# Altium PCB design6.PcbDoc
Units mm, origin at the board's own origin, x right, y up, seen from the top; angles counter-clockwise.
Board outline 22.01 x 100 mm, 2 copper layers (Top Layer, Bottom Layer); 56 components, 36 nets, 178 pads, 192 vias.
Unrouted connection lines stored in the file: 58.
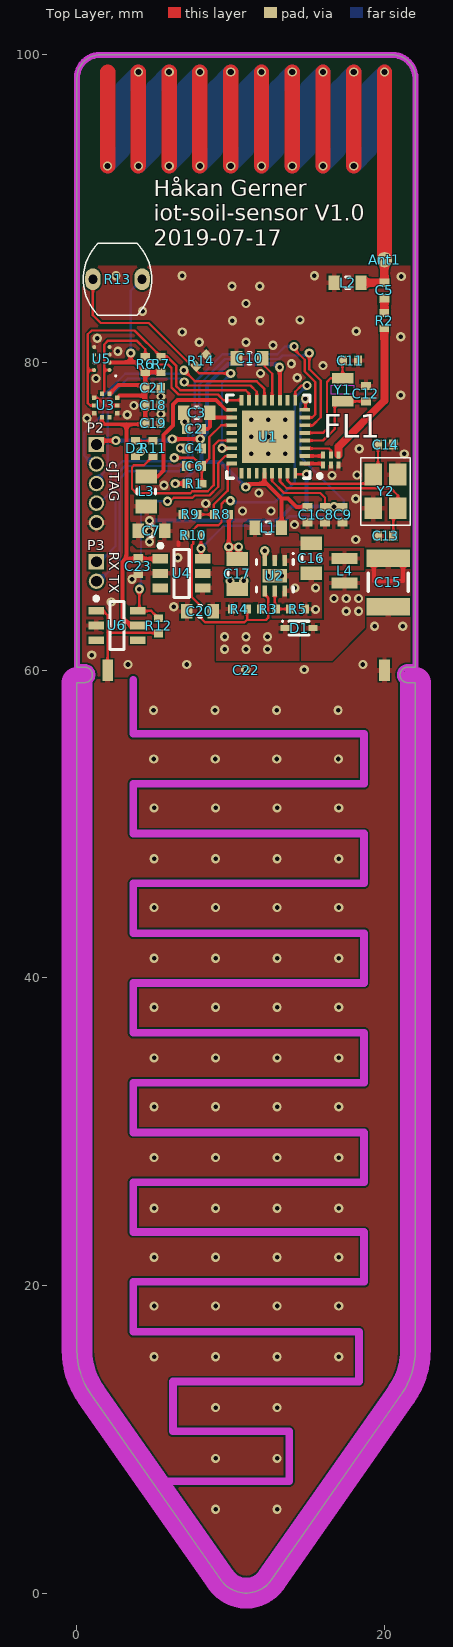
[diagram p0: Top Layer view]
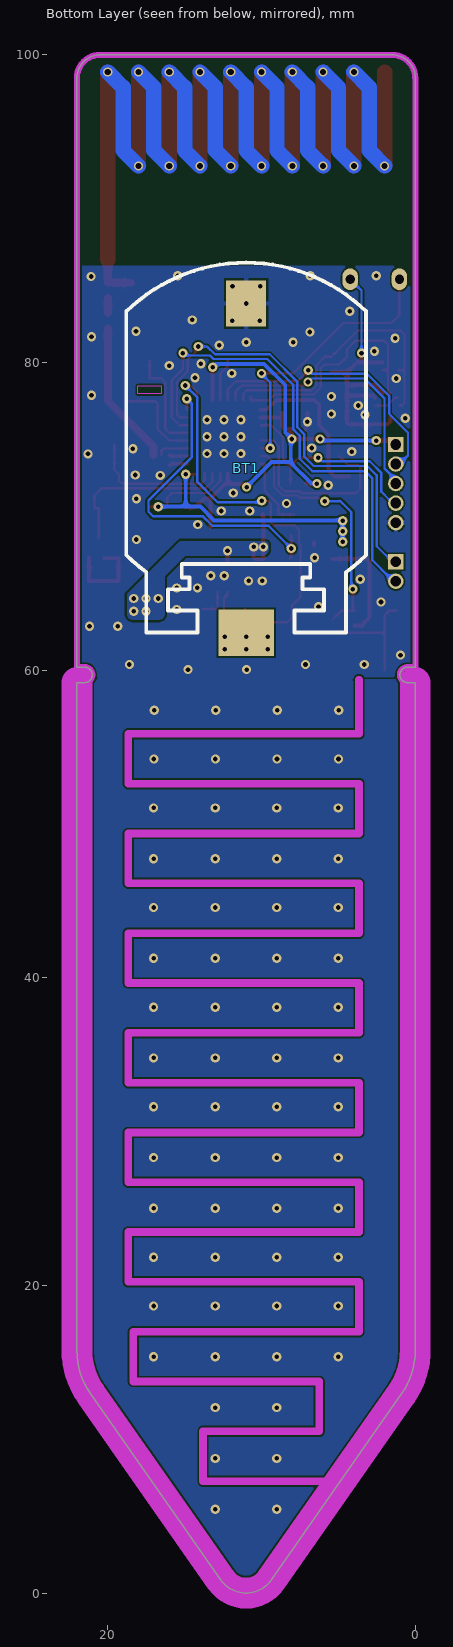
[diagram p1: Bottom Layer view, seen from below]
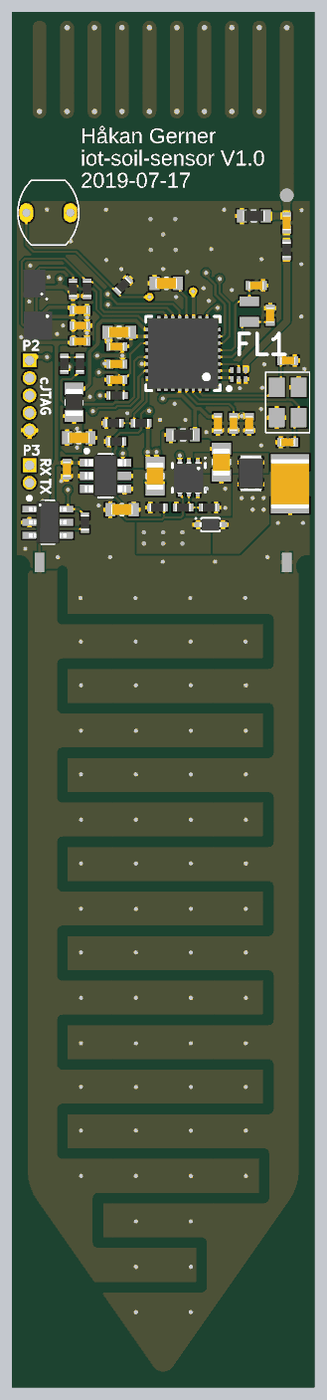
[diagram p2: 3D render of the assembled board from above, using the file's embedded part models]

## Layer stack, top to bottom
Top Solder: solder mask 0.0102, Solder Resist, Dk 3.5
Top Layer: signal copper 0.0356
Dielectric 1: dielectric 0.32, FR-4, Dk 4.8
Bottom Layer: signal copper 0.0356
Bottom Solder: solder mask 0.0102, Solder Resist, Dk 3.5

## Board outline
0.911,12.938 cw(c5.006,15.806) 0.006,15.806 0.006,59.198 0.508,59.198 ccw(c0.508,59.698) 0.501,60.198 0.001,60.198 0.001,98.506 0.006,98.506 cw(c1.506,98.506) 1.506,100.006 20.506,100.006 cw(c20.506,98.506) 22.006,98.506 22.006,60.198 21.513,60.198 ccw(c21.506,59.698) 21.506,59.198 22.006,59.198 22.006,15.806 cw(c17.006,15.806) 21.102,12.938 12.645,0.859 cw(c11.006,2.006) 9.368,0.859

## Design rules (kind name [scope] priority, off if disabled: settings)
Clearance [All] p1: gap=0.127 ignorepadtopadclearanceinfootprint=FALSE
ComponentClearance ComponentClearance_1 [InComponent('FL1') vs InComponent('U1')] p1: gap=0 collisioncheckmode=3 verticalgap=0 showdistances=FALSE
ComponentClearance ComponentClearance_2 [InComponent('Ant1') vs InComponent('R13')] p2: gap=0 collisioncheckmode=3 verticalgap=0 showdistances=FALSE
ComponentClearance [All] p3: gap=0.254 collisioncheckmode=3 verticalgap=0.254 showdistances=FALSE
DiffPairsRouting [All] p1: maxlimit=0.127 minlimit=0.127 mostfreqgap=0.127 toplayer_minwidth=0.218 toplayer_maxwidth=0.218 toplayer_prefwidth=0.218 bottomlayer_minwidth=0.218 bottomlayer_maxwidth=0.218 bottomlayer_prefwidth=0.218 maxuncoupledlength=12.7
Height Height_1 [InComponent('U3')] p1: minheight=0 maxheight=100 prefheight=12.7
Height [All] p2: minheight=0 maxheight=25.4 prefheight=12.7
HoleSize [All] p1: absolutevalues=TRUE maxlimit=2.54 minlimit=0.3 maxpercent=80.000 minpercent=20.000
MinimumSolderMaskSliver [All] p1: minsoldermaskwidth=0.127
PlaneClearance [All] p1: clearance=0.127
PlaneConnect [All] p1: planeconnectstyle=Direct reliefexpansion=0.508 reliefentries=4 reliefconductorwidth=0.254 reliefairgap=0.254
PolygonConnect [All] p1: thpad.connectstyle=Relief thpad.reliefconductorwidth=0.305 thpad.reliefentries=4 thpad.polygonreliefangle="90 Angle" thpad.airgapwidth=0.127 smdpad.connectstyle=Relief smdpad.reliefconductorwidth=0.305 smdpad.reliefentries=4 smdpad.polygonreliefangle="90 Angle" smdpad.airgapwidth=0.127 via.connectstyle=Direct via.reliefconductorwidth=0.254 via.reliefentries=4 via.polygonreliefangle="90 Angle" via.airgapwidth=0.254
RoutingVias [All] p1: holewidth=0.4 width=0.7 viastyle="Through Hole" minholewidth=0.3 minwidth=0.6 maxholewidth=0.5 maxwidth=0.8
SilkToSilkClearance [All] p1: silktosilkclearance=0.152
SolderMaskExpansion [All] p1: expansion=0.127
Width Width_50ohm [InNet('NetAnt1_1') OR InNet('NetFL1_1') OR InNet('NetC5_1')         OR InComponent('Ant1')] p1: maxlimit=1.27 minlimit=0.508 preferedwidth=0.508 minimp=50.000000 maximp=50.000000 favimp=50.000000
Width [All] p2: maxlimit=0.254 minlimit=0.127 preferedwidth=0.152 minimp=50.000000 maximp=50.000000 favimp=50.000000
22 further rules are at their usual default settings.

## Classes and differential pairs
differential pair RF: +RF_P -RF_N

## Components (designator, comment, footprint, x,y, rotation, side; value= is the part's Value field where it differs from the comment)
Ant1 "Antenna 868 Helix" ANTENNA_868_HELIX 20,86.69 r180 top net-tie
BT1 "Battery Coin Cell" S8421-45R 10.998,64 r180 bottom
C1 "Cap" "0402 (CAP)" 14.986,70.104 r90 top value=100nF
C2 "Cap" "0402 (CAP)" 7.62,75.692 r0 top value=100nF
C3 "Cap" "0603 (CAP)" 7.798,76.733 r0 top value=22uF
C4 "Cap" "0402 (CAP)" 7.62,74.422 r0 top value=100nF
C5 "Cap" "0402 (CAP)" 19.99,84.692 r90 top value=8.2pF
C6 "Cap" "0402 (CAP)" 7.62,73.279 r180 top value=100nF
C7 "Cap" "0603 (CAP)" 4.851,69.063 r180 top value=22uF
C8 "Cap" "0402 (CAP)" 16.129,70.104 r90 top value=100nF
C9 "Cap" "0402 (CAP)" 17.272,70.104 r90 top value=100nF
C10 "Cap" "0603 (CAP)" 11.227,80.289 r0 top value=1uF
C11 "Cap" "0402 (CAP)" 17.78,80.137 r180 top value=12pF
C12 "Cap" "0402 (CAP)" 18.796,77.978 r270 top value=12pF
C13 "DNM" "0402 (CAP)" 20.066,68.732 r0 top value=12pF
C14 "DNM" "0402 (CAP)" 20.074,74.676 r180 top value=12pF
C15 "GRM32EC70J107ME15L" "1210 (CAP)" 20.244,65.71 r90 top value=100uF
C16 "Cap" "0805 (CAP)" 15.24,67.285 r90 top value=22uF
C17 "Cap" "0805 (CAP)" 10.414,66.269 r90 top value=10uF
C18 "Cap" "0402 (CAP)" 4.953,77.216 r180 top value=100nF
C19 "Cap" "0402 (CAP)" 4.953,76.073 r180 top value=100nF
C20 "Cap" "0603 (CAP)" 8.001,63.83 r0 top value=1uF
C21 "Cap" "0402 (CAP)" 4.953,78.359 r180 top value=100nF
C22 "Chumidity" SOIL_CAP 11,17 r0 top locked net-tie value=1pF
C23 "Cap" "0402 (CAP)" 3.988,66.777 r90 top value=100nF
D1 "RB751S40T5G" SOD-523 14.453,62.738 r0 top
D2 "SML-P11VTT86R" "0402 (RES)"#1 3.81,74.422 r270 top
FL1 "Balun" 0850BM14E0016 16.51,73.66 r0 top
L1 "BLM18HE152SN1D" "0603 (IND)" 12.446,69.266 r0 top value="1500 Ohm"
L2 "Inductor" "0603 (IND)" 17.602,85.192 r180 top value=68nH
L3 "MLZ2012N6R8LT000" "0805 (IND)" 4.521,71.628 r270 top value=6.8uH
L4 "Inductor" SRN2009T 17.399,66.472 r90 top value=3.3uH
P2 "cJTAG" 5pin-1.27 1.27,72.136 r270 top
P3 "UART" 2pin-1.27 1.27,66.421 r270 top
R1 "Res1" "0402 (RES)"#2 7.62,72.136 r180 top value=100K
R2 "" "0402 (RES)"#1 19.99,82.728 r90 top value=0
R3 "DNM" "0402 (RES)"#1 12.446,63.983 r0 top value=0
R4 "Res1" "0402 (RES)"#1 10.566,63.983 r0 top value=10K
R5 "DNM" "0402 (RES)"#1 14.351,63.983 r0 top value=0
R6 "Res1" "0402 (RES)"#1 4.445,79.883 r270 top value=4.7K
R7 "Res1" "0402 (RES)"#1 5.461,79.883 r270 top value=4.7K
R8 "Res1" "0402 (RES)"#1 9.398,70.129 r0 top value=200K
R9 "Res1" "0402 (RES)"#1 7.366,70.129 r0 top value=200K
R10 "Res1" "0402 (RES)"#1 7.569,68.783 r0 top value=4.7K
R11 "Res1" "0402 (RES)"#1 4.953,74.422 r90 top value=1.8K
R12 "Rcharge" "0402 (RES)"#1 5.309,62.89 r90 top value=1k
R13 "200K - 10K" Photoresistor 2.642,85.42 r180 top
R14 "Res1" "0402 (RES)"#1 8.077,80.137 r225 top value=4.7K
U1 "CC1310RHB" VQFN-32_5X5 12.446,75.184 r180 top
U2 "TPS61291" TPS61291 12.868,66.142 r270 top
U3 "BMP388, Pressure sensor" BMP388 1.88,77.216 r0 top
U4 "TPS22860" SOT23-5 6.807,66.294 r0 top
U5 "HDC1010, Humidity, Temp" HDC1010 1.626,80.264 r180 top
U6 "74LVC2G14, Inverting Schmitt Trigger" 74LVC2G14 2.603,62.912 r0 top
Y1 "FC-12M 32.7680KA-A3" "FC-12M 32.7680KA-A3" 17.272,78.232 r270 top
Y2 "TSX-3225 24.0000MF20G-AC3" "TSX-3225 24.0000MF20G-AC3" 20.066,71.628 r90 top

## Footprints (in the part's own frame and the unit in brackets; to place one, negate y for a bottom-side part, rotate by r counter-clockwise, add the part's x,y. Pads: shape width x height; smd on the part's side, far side on the other; paste and mask are expansions set on the pad)
2pin-1.27 [mm]
  rect 1x1 hole 0.7: 1(-0.635,0)
  round 1 hole 0.7: 2(0.635,0)
5pin-1.27 [mm]
  rect 1x1 hole 0.7: 1(-2.54,0)
  round 1 hole 0.7: 2(-1.27,0) 3(0,0) 4(1.27,0) 5(2.54,0)
74LVC2G14 [mm] "TSOP, 6-Leads, Body 2,90x1,50mm, Pitch 0,95mm, IPC Medium Density"
  rect 1x0.5 smd: 1(-1.35,0.95) 2(-1.35,0) 3(-1.35,-0.95) 4(1.35,-0.95) 5(1.35,0) 6(1.35,0.95)
  silkscreen extent -1.47,-1.55 0.45,1.87, body extent -1.38,-1.55 1.38,1.55, height 1.1
"0402 (CAP)" [mm] "Chip Capacitor, 2-Leads, Body 1,60x0,80mm, IPC Medium Density"
  rect 0.54x0.64 smd: 1(-0.5,0) 2(0.5,0)
  body extent -0.55,-0.3 0.55,0.3, height 0.4
"0402 (RES)"#1 [mm] "Chip Resistor, 2-Leads, Body 1,00x0,50mm, IPC Medium Density"
  rect 0.5x0.6 smd: 1(-0.5,0) 2(0.5,0)
  body extent -0.55,-0.3 0.55,0.3, height 0.4
"0402 (RES)"#2 [mm] "Chip Resistor, 2-Leads, Body 1,00x0,50mm, IPC Medium Density"
  rect 0.6x0.5 smd: 1(-0.5,0)
  rect 0.5x0.6 smd: 2(0.5,0)
  body extent -0.55,-0.3 0.55,0.3, height 0.4
"0603 (CAP)" [mm] "Chip Capacitor, 2-Leads, Body 1,60x0,80mm, IPC Medium Density"
  rect 0.75x0.95 smd: 1(-0.85,0) 2(0.85,0)
  silkscreen extent -0.1,-0.38 0.1,0.38, body extent -0.8,-0.4 0.8,0.4, height 0.6
"0603 (IND)" [mm]
  rect 0.72x0.94 smd: 1(-0.87,0) 2(0.87,0)
  silkscreen extent -0.15,-0.37 0.15,0.37, body extent -0.8,-0.4 0.8,0.4, height 0.6
"0805 (CAP)" [mm] "Chip Capacitor, 2-Leads, Body 2,00x1,25mm, IPC Medium Density"
  rect 0.9x1.4 smd: 1(-0.975,0) 2(0.975,0)
  silkscreen extent -0.15,-0.6 0.15,0.6, body extent -1,-0.63 1,0.63, height 0.6
"0805 (IND)" [mm] "Chip Inductor, 2-Leads, Body 2,00x1,25mm, IPC Medium Density"
  rect 0.9x1.39 smd: 1(-0.98,0) 2(0.98,0)
  silkscreen extent -0.15,-0.6 0.15,0.6, body extent -1,-0.63 1,0.63, height 0.6
0850BM14E0016 [mm]
  rect 0.25x0.45 smd: 1(0.5,0.325) 2(0,0.325) 3(-0.5,0.325) 4(-0.5,-0.325) 5(0,-0.325) 6(0.5,-0.325)
  body extent -0.74,-0.66 0.74,0.66, height 1
"1210 (CAP)" [mm] "Chip Capacitor, 2-Leads, Body 3,20x2,50mm, IPC Medium Density"
  rect 1.15x2.8 smd: 1(-1.575,0) 2(1.575,0)
  silkscreen extent -0.6,-1.3 0.6,1.3, body extent -1.8,-1.4 1.8,1.4, height 2.8
ANTENNA_868_HELIX [mm]
  round 1 smd: 1(0,0)
  Top Layer lines w1: 18,-6.1 18,-12.2 ; 16,-6.1 16,-12.2 ; 14,-6.1 14,-12.2 ; 12,-6.1 12,-12.2 ; 10,-6.1 10,-12.2 ; 8,-6.1 8,-12.2 ; 6,-6.1 6,-12.2 ; 4,-6.1 4,-12.2 ; 2,-6.1 2,-12.2 ; 0,0 0,-12.2
  Bottom Layer lines w1: 18,-6.1 17,-7.1 17,-11.2 16,-12.2 ; 16,-6.1 15,-7.1 15,-11.2 14,-12.2 ; 14,-6.1 13,-7.1 13,-11.2 12,-12.2 ; 12,-6.1 11,-7.1 11,-11.2 10,-12.2 ; 10,-6.1 9,-7.1 9,-11.2 8,-12.2 ; 8,-6.1 7,-7.1 7,-11.2 6,-12.2 ; 6,-6.1 5,-7.1 5,-11.2 4,-12.2 ; 4,-6.1 3,-7.1 3,-11.2 2,-12.2 ; 2,-6.1 1,-7.1 1,-11.2 0,-12.2
BMP388 [mm] "LGA, 10-Leads, Body 2,00x2,00mmx0,80mm, Pitch 0,50mm"
  rect 0.275x0.275 smd: 1(0.25,0.762) 2(-0.25,0.762) 3(-0.75,0.5) 4(-0.75,0) 5(-0.75,-0.5) 6(-0.25,-0.763) 7(0.25,-0.763) 8(0.75,-0.5) 9(0.75,0) 10(0.75,0.5)
  body extent -1.02,-1.03 1.65,1.02, height 30
"FC-12M 32.7680KA-A3" [mm]
  rect 0.7x1.4 smd: 1(-0.75,0) 2(0.75,0)
  Keep-Out Layer region: -0.254,-0.762 0.254,-0.762 0.254,0.762 -0.254,0.762
  body extent -1.19,-0.79 1.19,0.79, height 1
HDC1010 [mm] "BGA, 8-Leads, Body 1,59x2,04mmx0,68mm, Pitch 0,50mm"
  round 0.26 smd: A1(-0.5,0.75) A2(0.5,0.75) B1(-0.5,0.25) B2(0.5,0.25) C1(-0.5,-0.25) C2(0.5,-0.25) D1(-0.5,-0.75) D2(0.5,-0.75)
  silkscreen extent -0.95,1.08 -0.85,1.17, body extent -0.79,-1.02 0.79,1.02, height 0.67
Photoresistor [mm]
  oval 1x1.4 hole 0.6: 1(-1.6,0) 2(1.6,0)
  silkscreen extent -2.22,-2.35 2.22,2.35
S8421-45R [mm]
  rect 3.6x3 smd: 1(0,-1.556)
  rect 2.6x3 smd: 2(0,19.844)
  silkscreen extent -7.8,-1.56 7.8,22.5, body extent -11.04,-3.19 11.04,22.79, height 4.7
SOD-523 [mm] "Molded Diode, 2-Leads, Body 1,20x0,80mm, IPC Medium Density"
  rect 0.6x0.4 smd: 1(-0.9,0) 2(0.9,0)
  silkscreen extent -1.12,-0.45 0.65,0.5, body extent -0.87,-0.45 0.87,0.45, height 0.7
SOIL_CAP [mm]
  rect 0.7x1.4 smd: 1(-9,43) 2(9,43)
  Keep-Out Layer lines w0.5: -7.339,42.393 -7.339,38.867 7.661,38.867 7.661,35.628 -7.339,35.628 -7.339,32.389 7.661,32.389 7.661,29.15 -7.339,29.15 -7.339,25.911 7.661,25.911 7.661,22.672 -7.339,22.672 -7.339,19.434 7.661,19.434 7.661,16.195 -7.339,16.195 -7.339,12.956 7.661,12.956 7.661,9.717 -7.339,9.717 -7.339,6.478 7.661,6.478 7.661,3.239 -7.339,3.239 -7.339,0 7.339,0 7.339,-3.239 -4.749,-3.239 -4.749,-6.478 2.803,-6.478 2.803,-9.717 -5.777,-9.717
SOT23-5 [mm] "SOT23, 5-Leads, Body 2,90x2,80mm, Pitch 0,95mm, IPC Medium Density"
  rect 1x0.6 smd: 1(-1.375,0.95) 2(-1.375,0) 3(-1.375,-0.95) 4(1.375,-0.95) 5(1.375,0) 6(1.375,0.95)
  silkscreen extent -1.5,-1.55 0.5,1.92, body extent -1.5,-1.53 1.5,1.53, height 1.45
SRN2009T [mm] "Molded Inductor, 2-Leads, Body 2,00x1,60mm, IPC Medium Density"
  rect 0.7x1.7 smd: 1(-0.8,0) 2(0.8,0)
  body extent -1.32,-0.9 1.32,0.9, height 0.95
TPS61291 [mm] "SON, 6-Leads, Body 2,00x2,00mm, Pitch 0,65mm, Thermal Pad 1,60x0,89mm, IPC Medium Density"
  rect 0.7x0.3 smd: 1(-0.995,0.65) 2(-0.995,0) 3(-0.995,-0.65) 4(0.995,-0.65) 5(0.995,0) 6(0.995,0.65)
  rect 0.89x1.6 smd: 7(0,0)
  silkscreen extent -1.5,-1.2 1.05,1.25, body extent -1.13,-1.05 1.13,1.05, height 0.8
"TSX-3225 24.0000MF20G-AC3" [mm]
  rect 1.4x1.15 smd: 1(-1.1,-0.8) 2(1.1,-0.8) 3(1.1,0.8) 4(-1.1,0.8)
  silkscreen extent -2.2,-1.6 2.2,1.6, body extent -2.2,-1.6 2.2,1.6, height 1
VQFN-32_5X5 [mm] "QFN, 32-Leads, Body 5,00x5,00mm, Pitch 0,50mm, Thermal Pad 3,45x3,45mm, IPC Medium Density"
  rect 0.7x0.25 smd: 1(-2.375,1.75) 2(-2.375,1.25) 3(-2.375,0.75) 4(-2.375,0.25) 5(-2.375,-0.25) 6(-2.375,-0.75) 7(-2.375,-1.25) 8(-2.375,-1.75) 17(2.375,-1.75) 18(2.375,-1.25) 19(2.375,-0.75) 20(2.375,-0.25) 21(2.375,0.25) 22(2.375,0.75) 23(2.375,1.25) 24(2.375,1.75)
  rect 0.25x0.7 smd: 9(-1.75,-2.375) 10(-1.25,-2.375) 11(-0.75,-2.375) 12(-0.25,-2.375) 13(0.25,-2.375) 14(0.75,-2.375) 15(1.25,-2.375) 16(1.75,-2.375) 25(1.75,2.375) 26(1.25,2.375) 27(0.75,2.375) 28(0.25,2.375) 29(-0.25,2.375) 30(-0.75,2.375) 31(-1.25,2.375) 32(-1.75,2.375)
  rect 3.4x3.4 smd: 33(0,0)
  silkscreen extent -3.47,-2.7 2.7,2.7, body extent -2.55,-2.55 2.55,2.55, height 1

## Part data
BT1: Part Number=S8421-45R
C1 C2 C4 C6 C8 C9 C18 C19 C21 C23: "Capacitor", Part Number=GCM155R71C104KA55J, LatestRevisionDate=17-Jul-2002, LatestRevisionNote="Re-released for DXP Platform.", PackageDescription="Radial Cap, Thru-Hole; 2 Leads; 0.3 in Pin Spacing", PackageReference=RAD-0.3, Published=8-Jun-2000, Publisher="Altium Limited"
C3 C7 C16: "Capacitor", Part Number=GRM21BD71A226ME44L, LatestRevisionDate=17-Jul-2002, LatestRevisionNote="Re-released for DXP Platform.", PackageDescription="Radial Cap, Thru-Hole; 2 Leads; 0.3 in Pin Spacing", PackageReference=RAD-0.3, Published=8-Jun-2000, Publisher="Altium Limited"
C5: "Capacitor", Part Number=250R05L8R2CV4T, LatestRevisionDate=17-Jul-2002, LatestRevisionNote="Re-released for DXP Platform.", PackageDescription="Radial Cap, Thru-Hole; 2 Leads; 0.3 in Pin Spacing", PackageReference=RAD-0.3, Published=8-Jun-2000, Publisher="Altium Limited"
C10 C20: "Capacitor", Part Number=GCM188R71E105KA64D, LatestRevisionDate=17-Jul-2002, LatestRevisionNote="Re-released for DXP Platform.", PackageDescription="Radial Cap, Thru-Hole; 2 Leads; 0.3 in Pin Spacing", PackageReference=RAD-0.3, Published=8-Jun-2000, Publisher="Altium Limited"
C11 C12: "Capacitor", Part Number=GCM1555C1H120JA16D, LatestRevisionDate=17-Jul-2002, LatestRevisionNote="Re-released for DXP Platform.", PackageDescription="Radial Cap, Thru-Hole; 2 Leads; 0.3 in Pin Spacing", PackageReference=RAD-0.3, Published=8-Jun-2000, Publisher="Altium Limited"
C13 C14: library part Cap, "Capacitor", Part Number=GCM1555C1H120JA16D, LatestRevisionDate=17-Jul-2002, LatestRevisionNote="Re-released for DXP Platform.", PackageDescription="Radial Cap, Thru-Hole; 2 Leads; 0.3 in Pin Spacing", PackageReference=RAD-0.3, Published=8-Jun-2000, Publisher="Altium Limited"
C15: library part Cap, "Capacitor", Part Number=GCM155R71C104KA55J, LatestRevisionDate=17-Jul-2002, LatestRevisionNote="Re-released for DXP Platform.", PackageDescription="Radial Cap, Thru-Hole; 2 Leads; 0.3 in Pin Spacing", PackageReference=RAD-0.3, Published=8-Jun-2000, Publisher="Altium Limited"
C17: "Capacitor", Part Number=GRM21BC71C106KE11L, LatestRevisionDate=17-Jul-2002, LatestRevisionNote="Re-released for DXP Platform.", PackageDescription="Radial Cap, Thru-Hole; 2 Leads; 0.3 in Pin Spacing", PackageReference=RAD-0.3, Published=8-Jun-2000, Publisher="Altium Limited"
C22: library part Cap, "Capacitor", Part Number=N/A, LatestRevisionDate=17-Jul-2002, LatestRevisionNote="Re-released for DXP Platform.", PackageDescription="Radial Cap, Thru-Hole; 2 Leads; 0.3 in Pin Spacing", PackageReference=RAD-0.3, Published=8-Jun-2000, Publisher="Altium Limited"
D1: library part "D Schottky", "Schottky Diode", Code_JEDEC=DO-214-AA, LatestRevisionDate=17-Jul-2002, LatestRevisionNote="Re-released for DXP Platform.", PackageDescription="DO-214-AA/SMB; 2 C-Bend Leads; Body 5.3 x 3.6 mm, inc. leads (LxW)", PackageReference=SMB, Part Number=RB751S40T5G, Published=8-Jun-2000, Publisher="Altium Limited"
D2: library part LED2, "Typical RED, GREEN, YELLOW, AMBER GaAs LED", LatestRevisionDate=17-Jul-2002, LatestRevisionNote="Re-released for DXP Platform.", PackageDescription="SM LED; 2 Flat Leads", PackageReference=3.2X1.6X1.1, PackageVersion=Feb-2002, Part Number=SML-P11VTT86R, Published=8-Jun-2000, Publisher="Altium Limited"
FL1: library part 0850BM14E0016, Part Number=0850BM14E0016T
L1: library part "Inductor Iron", "Magnetic-Core Inductor", LatestRevisionDate=17-Jul-2002, LatestRevisionNote="Re-released for DXP Platform.", PackageDescription="Axial Device, Thru-Hole; 2 Leads; 0.9 in Pin Spacing", PackageReference=AXIAL-0.9, Part Number=BLM18HE152SN1D, Published=24-Mar-1999, Publisher="Altium Limited"
L2: Part Number=PE-0603CD680GTT, Code_IEC=1005, Code_JEITA=0603, LatestRevisionDate=29-May-2009, LatestRevisionNote="IPC-7351 Footprint Added.", PackageDescription="Chip Inductor", PackageReference=0603, Published=8-Jun-2000, Publisher="Altium Limited"
L3: library part Inductor, "Inductor", Code_IEC=1005, Code_JEITA=0402, LatestRevisionDate=29-May-2009, LatestRevisionNote="IPC-7351 Footprint Added.", PackageDescription="Chip Inductor", PackageReference=0402-A, Part Number=MLZ2012N6R8LT000, Published=8-Jun-2000, Publisher="Altium Limited"
L4: Part Number=SRN2009T-3R3M, Code_IEC=1005, Code_JEITA=0402, LatestRevisionDate=29-May-2009, LatestRevisionNote="IPC-7351 Footprint Added.", PackageDescription="Chip Inductor", PackageReference=0402-A, Published=8-Jun-2000, Publisher="Altium Limited"
P2: library part "Header 5", "Header, 5-Pin", LatestRevisionDate=17-Jul-2002, LatestRevisionNote="Re-released for DXP Platform.", Publisher="Altium Limited"
P3: library part "Header 2", "Header, 2-Pin", LatestRevisionDate=17-Jul-2002, LatestRevisionNote="Re-released for DXP Platform.", Publisher="Altium Limited"
R1: "Resistor", Part Number=CRCW0402100KFKED, LatestRevisionDate=17-Jul-2002, LatestRevisionNote="Re-released for DXP Platform.", PackageDescription="Axial Device, Thru-Hole; 2 Leads; 0.3 in Pin Spacing", PackageReference=AXIAL-0.3, Published=8-Jun-2000, Publisher="Altium Limited"
R2 R3 R5: library part Res1, "Resistor", Part Number=ERJ-2GE0R00X, LatestRevisionDate=17-Jul-2002, LatestRevisionNote="Re-released for DXP Platform.", PackageDescription="Axial Device, Thru-Hole; 2 Leads; 0.3 in Pin Spacing", PackageReference=AXIAL-0.3, Published=8-Jun-2000, Publisher="Altium Limited"
R4: "Resistor", Part Number=CRCW040210K0JNEDC, LatestRevisionDate=17-Jul-2002, LatestRevisionNote="Re-released for DXP Platform.", PackageDescription="Axial Device, Thru-Hole; 2 Leads; 0.3 in Pin Spacing", PackageReference=AXIAL-0.3, Published=8-Jun-2000, Publisher="Altium Limited"
R6 R7 R10 R14: "Resistor", Part Number=CRCW04024K70FKEDC, LatestRevisionDate=17-Jul-2002, LatestRevisionNote="Re-released for DXP Platform.", PackageDescription="Axial Device, Thru-Hole; 2 Leads; 0.3 in Pin Spacing", PackageReference=AXIAL-0.3, Published=8-Jun-2000, Publisher="Altium Limited"
R8 R9: "Resistor", Part Number=CRG0402F4K7, LatestRevisionDate=17-Jul-2002, LatestRevisionNote="Re-released for DXP Platform.", PackageDescription="Axial Device, Thru-Hole; 2 Leads; 0.3 in Pin Spacing", PackageReference=AXIAL-0.3, Published=8-Jun-2000, Publisher="Altium Limited"
R11: "Resistor", Part Number=ERJ-2RKF1801X, LatestRevisionDate=17-Jul-2002, LatestRevisionNote="Re-released for DXP Platform.", PackageDescription="Axial Device, Thru-Hole; 2 Leads; 0.3 in Pin Spacing", PackageReference=AXIAL-0.3, Published=8-Jun-2000, Publisher="Altium Limited"
R12: library part Res1, "Resistor", Part Number=RMCF0402ZT0R00CT-ND, LatestRevisionDate=17-Jul-2002, LatestRevisionNote="Re-released for DXP Platform.", PackageDescription="Axial Device, Thru-Hole; 2 Leads; 0.3 in Pin Spacing", PackageReference=AXIAL-0.3, Published=8-Jun-2000, Publisher="Altium Limited"
R13: library part "Photo Resistor"
U1: Part Number=CC1310F128RHBT
U2: Part Number=TPS61291DRVR
U3: library part BMP388, Part Number=BMP388
U4: Part Number=TPS22860DBVR
U5: library part HDC1010, Part Number=HDC1010YPAR
U6: library part 74LVC2G14, Part Number=74LVC2G14GV,125
Y1: library part XTAL, "Crystal Oscillator", LatestRevisionDate=17-Jul-2002, LatestRevisionNote="Re-released for DXP Platform.", PackageDescription="Crystal, Thru-Hole; 2 Leads; Body 3.1 x 8.2 mm (Dia.xH)", PackageReference=R38, Part Number="FC-12M 32.7680KA-A3", Published=8-Jun-2000, Publisher="Altium Limited"
Y2: library part Crystal, Part Number="TSX-3225 24.0000MF20G-AC3"

## Via types
v1: diameter 0.6, hole 0.3, Top Layer to Bottom Layer, tented both sides, 163 vias
v2: diameter 0.6, hole 0.4, Top Layer to Bottom Layer, tented both sides, 18 vias
v3: diameter 0.6, hole 0.3, Top Layer to Bottom Layer, tented bottom, 9 vias
v4: diameter 0.6, hole 0.3, Top Layer to Bottom Layer, 2 vias

## Nets (pads, with @x,y where several pads share a name; then routed paths per layer and width w, separated by ;. In a path a pad name is that pad's centre, name@x,y a point inside that pad or via, vN(x,y) a via of type N, cw(c..) or ccw(c..) an arc to the next point about the centre after c; other vN are vias at no path point)
Bat_Sense: R8.1 R9.2 U1.24 | length 5
  Top Layer w0.152: R9.2 R8.1 8.898,70.772 9.804,71.679 9.804,73.434 U1.24
DCDC_SW: L3.1 U1.17 | length 10.2
  Top Layer w0.254: L3.1@4.318,72.608 L3.1 5.258,72.608 5.639,72.989 5.639,75.311 5.827,75.499 5.828,75.499 5.977,75.648 5.977,75.649 6.248,75.921 6.248,77.267 6.553,77.572 9.042,77.572 9.68,76.934 U1.17
EN_BYP: R4.2 U1.9 U2.4 | length 29.9
  Top Layer w0.152: v1(9.982,71.018) 9.601,71.018 9.398,70.815 9.398,69.621 9.195,69.418 7.849,69.418 7.569,69.139 7.569,68.224 7.468,68.123 7.468,64.77 8.026,64.211 8.026,63.627 8.028,63.626 8.028,63.426 8.335,63.119 10.897,63.119 11.049,63.271 ; R4.2 11.066,63.289 11.049,63.271 ; U2.4 12.218,64.921 12.446,64.694 12.446,63.424 12.294,63.271 11.049,63.271 ; U1.9 14.196,78.105 14.602,78.511 v1(14.961,78.511)
  Bottom Layer w0.152: v1(9.982,71.018) 10.084,70.917 12.852,70.917 14.173,72.238 14.173,77.724 v1(14.961,78.511)
GND: BT1.2 C1.1 C2.1 C3.1 C4.1 C6.2 C7.1 C8.1 C9.1 C10.1 C11.1 C12.1 C13.1 C14.1 C15.1 C16.1 C17.1 C18.1 C19.1 C20.1 C21.1 C22.2 C23.1 D2.2 FL1.5 FL1.6 L2.2 P2.5 R5.2 R9.1 R10.1 R14.1 U1.33 U2.6 U2.7 U3.3 U3.5 U3.8 U3.9 U4.2 U5.B2 U5.C1 U5.D1 U5.D2 U6.2 Y2.2 Y2.4 | length 3.4
  Top Layer w0.152: U3.3 1.329,77.716 1.829,77.216 U3.9
  Top Layer w0.254: 6.604,68.148 6.604,68.318 ; v1(6.731,74.447) 7.095,74.447 C4.1 ; v1(7.018,76.149) C3.1@7.018,76.733 ; C2.1@7.12,75.641 v1@7.12,76.2
  other v1: 9.018,5.461 13.018,5.461 9.018,12.065 13.018,12.065 5.018,18.669 9.018,18.669 13.018,18.669 17.018,18.669 5.018,25.019 9.018,25.019 13.018,25.019 17.018,25.019 5.018,31.623 9.018,31.623 13.018,31.623 17.018,31.623 5.018,38.1 9.018,38.1 13.018,38.1 17.018,38.1 5.018,44.577 9.018,44.577 13.018,44.577 17.018,44.577 5.018,51.054 9.018,51.054 13.018,51.054 17.018,51.054 4.982,57.404 8.982,57.404 12.982,57.404 16.982,57.404 10.973,60.046 14.783,60.046 3.327,60.376 7.144,60.376 18.593,60.376 0.965,60.985 19.355,62.865 21.184,62.865 15.519,63.957 6.299,64.135 2.235,64.44 14.173,65.354 15.519,65.354 9.957,65.811 10.846,65.811 3.581,65.913 12.421,66.142 13.31,66.142 6.553,67.31 18.136,68.504 14.148,69.469 10.77,70.358 12.624,70.358 8.382,70.841 18.136,71.145 11.836,71.526 5.664,72.034 16.586,72.669 18.212,72.695 21.285,74.066 4.14,74.219 18.364,74.397 0.66,76.378 3.277,76.606 5.461,76.657 3.708,77.216 5.461,77.8 21.057,77.876 1.245,78.969 14.326,79.019 11.938,79.299 16.002,79.807 13.945,79.934 2.667,80.747 12.751,81.128 7.95,81.331 10.998,81.331 1.321,81.585 21.057,81.686 6.858,81.991 18.161,82.042 10.109,82.725 11.913,82.725 14.503,82.779 4.267,83.337 10.998,83.844 10.084,84.963 11.887,84.963 21.082,85.598 2.54,85.649 6.841,85.649 15.443,85.649
  other v3: 11.346,74.084 12.446,74.084 13.546,74.084 11.346,75.184 12.446,75.184 13.546,75.184 11.346,76.284 12.446,76.284 13.546,76.284
JTAG_TCK: P2.3 U1.14 | length 17
  Top Layer w0.152: v1(6.985,78.74) 7.214,78.511 11.29,78.511 11.696,78.105 U1.14
  Bottom Layer w0.152: P2.3 1.27,72.39 2.007,73.127 2.007,77.673 3.302,78.969 6.756,78.969 v1(6.985,78.74)
JTAG_TMS: P2.2 U1.13 | length 17.8
  Top Layer w0.152: v1(6.96,79.502) 7.671,78.791 11.684,78.791 12.192,78.283 12.192,77.563 U1.13
  Bottom Layer w0.152: P2.2 1.041,73.406 0.483,73.965 0.483,75.438 1.702,76.657 1.702,77.826 3.15,79.273 6.731,79.273 v1(6.96,79.502)
NetAnt1_1: Ant1.1 C5.2 L2.1 | length 3
  Top Layer w0.508: L2.1 C5.2 Ant1.1@19.99,86.665
NetBT1_1: BT1.1 D1.1
  other v1: 9.601,61.366 10.998,61.366 12.395,61.366 9.601,62.179 10.998,62.179 12.395,62.179
NetC5_1: C5.1 R2.2 | length 1
  Top Layer w0.508: R2.2 C5.1
NetC10_2: C10.2 U1.12 | length 2.8
  Top Layer w0.152: C10.2@12.209,80.188 12.209,79.764 12.696,79.277 U1.12
NetC11_2: C11.2 U1.5 Y1.1 | length 6.9
  Top Layer w0.152: U1.5 15.998,75.434 16.256,75.692 16.256,78.74 16.498,78.982 Y1.1 17.272,80.129 C11.2
NetC12_2: C12.2 U1.4 Y1.2 | length 6
  Top Layer w0.152: U1.4 16.006,74.934 16.764,75.692 16.764,77.343 16.903,77.482 Y1.2 18.792,77.482 C12.2
NetC13_2: C13.2 U1.30 Y2.1 | length 11.7
  Top Layer w0.152: U1.30 13.196,72.275 13.64,71.831 18.6,71.831 18.607,71.825 19.925,71.825 19.932,71.831 20.2,71.831 20.207,71.825 20.415,71.825 20.866,71.374 Y2.1 20.574,70.528 C13.2@20.574,68.58
NetC14_2: C14.2 U1.31 Y2.3 | length 8.7
  Top Layer w0.152: U1.31 13.696,72.334 13.894,72.136 19.075,72.136 19.266,72.327 Y2.3 19.574,73.036 C14.2
NetC22_1: C22.1 R12.1 U6.1 | length 7.8
  Top Layer w0.152: U6.1 1.721,63.862 2,63.583 2,62.433 ; C22.1 2,62.433 ; R12.1 5.266,62.433 2,62.433
  other v1: 9.018,8.763 13.018,8.763 5.018,15.367 9.018,15.367 13.018,15.367 17.018,15.367 5.018,21.844 9.018,21.844 13.018,21.844 17.018,21.844 5.018,28.321 9.018,28.321 13.018,28.321 17.018,28.321 5.018,34.798 9.018,34.798 13.018,34.798 17.018,34.798 5.018,41.275 9.018,41.275 13.018,41.275 17.018,41.275 5.018,47.752 9.018,47.752 13.018,47.752 17.018,47.752 5,54.229 9,54.229 13,54.229 17,54.229
NetD2_1: D2.1 R11.2 | length 1.1
  Top Layer w0.127: D2.1 R11.2
NetFL1_1: FL1.1 R2.1 | length 9.5
  Top Layer w0.508: FL1.1@17.016,73.985 17.018,73.987 17.018,74.549 19.99,77.521 R2.1
NetFL1_2: FL1.2 U1.3 | length 2.1
  Top Layer w0.152: U1.3 14.833,74.422 16.383,74.422 16.51,74.295 FL1.2
NetL4_2: L4.2 U2.1
NetR3_2: R3.2 R5.1 U2.5 | length 2.1
  Top Layer w0.152: U2.5 12.868,64.06 R3.2 R5.1
NetR11_1: R11.1 U1.21 | length 12.6
  Top Layer w0.152: R11.1 4.953,73.914 4.369,73.33 3.708,73.33 3.581,73.203 3.581,71.806 3.886,71.501 7.366,71.501 7.507,71.642 8.509,71.642 8.89,72.023 8.89,74.6 9.227,74.937 9.644,74.937 9.647,74.934 U1.21
NetR13_2: R13.2 R14.2 U1.22 | length 18.9
  Top Layer w0.127: v1(9.435,74.434) U1.22
  Top Layer w0.152: R13.2@1.042,85.7 R13.2 1.042,83.083 1.549,82.575 4.674,82.575 7.531,79.718 7.95,79.299 v4(10.008,79.299)
  Bottom Layer w0.152: v1(9.435,74.434) 9.435,78.701 10.008,79.273 v4(10.008,79.299)
PWR_ON: R10.2 U1.8 U4.6 | length 21.4
  Top Layer w0.152: R10.2 v1(8.069,67.92) ; U4.6 8.069,67.357 v1(8.069,67.92) ; v1@8.225,67.92 v1(8.069,67.92) ; U1.8 14.859,76.972 v1(14.859,77.648)
  Bottom Layer w0.152: v1(8.069,67.92) 9.542,69.393 13.208,69.393 13.818,70.002 17.043,70.002 17.348,70.307 17.348,71.044 14.529,73.863 14.529,77.318 v1(14.859,77.648)
RESET_N: C6.1 P2.4 R1.1 U1.19 | length 13.9
  Top Layer w0.152: v1(6.325,73.812) 7.587,73.812 C6.1 ; R1.1 C6.1 ; U1.19 9.386,75.934 8.611,75.159 8.611,73.77 C6.1
  Bottom Layer w0.152: P2.4@1.27,71.12 1.727,71.12 2.21,71.603 2.21,72.822 2.972,73.584 6.096,73.584 v1(6.325,73.812)
RF_N: FL1.3 U1.2 | length 1.2
  Top Layer w0.218: U1.2 15.959,73.934 FL1.3
RF_P: FL1.4 U1.1 | length 1.2
  Top Layer w0.218: U1.1 15.911,73.434 FL1.4
SCL: R6.1 U1.16 U3.2 U5.A1 | length 15.5
  Top Layer w0.152: U3.2 1.778,78.127 1.778,79.514 ; U5.A1 1.778,79.514 ; U1.16@10.696,77.772 U1.16 9.538,77.559 9.169,77.927 6.604,77.927 6.147,78.384 6.147,79.654 5.918,79.883 4.945,79.883 R6.1 4.445,80.874 3.886,81.432 2.032,81.432 1.778,81.178 1.778,79.514
SDA: R7.1 U1.15 U3.4 U5.A2 | length 18.8
  Top Layer w0.152: U3.4@1.028,77.216 0.864,77.216 0.711,77.368 0.711,79.502 ; U5.A2 1.114,79.502 0.711,79.502 ; U1.15 11.196,77.983 10.973,78.207 6.731,78.207 6.452,78.486 6.452,79.807 5.867,80.391 5.469,80.391 R7.1 3.751,82.093 0.965,82.093 0.711,81.839 0.711,79.502
SOIL_HUMIDITY: R12.2 U1.23 U6.6 | length 16.4
  Top Layer w0.152: v1(4.064,65.278) 4.064,63.973 U6.6 4.837,63.862 R12.2 R12.2@5.309,63.365 ; v1(5.893,70.993) 6.071,70.993 6.096,71.018 6.299,71.222 7.518,71.222 7.66,71.363 8.625,71.363 9.195,71.933 9.195,73.477 9.652,73.934 U1.23
  Bottom Layer w0.152: v1(4.064,65.278) 4.166,65.38 4.166,70.282 4.75,70.866 4.902,71.018 4.928,70.993 v1(5.893,70.993)
UART_RX: P3.1 U1.7 | length 29.7
  Top Layer w0.152: v1(14.122,81.051) 14.122,80.874 14.808,80.188 14.808,79.426 15.494,78.74 15.494,76.632 15.296,76.434 U1.7
  Bottom Layer w0.152: P3.1 1.51,67.056 2.515,68.061 2.515,72.669 3.124,73.279 6.604,73.279 7.234,73.909 7.234,75.357 7.31,75.433 7.671,75.794 7.671,78.74 9.474,80.543 13.03,80.543 13.538,81.051 v1(14.122,81.051)
UART_TX: P3.2 U1.6 | length 31.3
  Top Layer w0.152: U1.6 14.834,75.921 15.316,75.921 15.85,76.454 15.85,78.842 15.113,79.578 v1(15.113,80.62)
  Bottom Layer w0.152: P3.2@1.27,66.04 1.676,66.04 2.794,67.158 2.794,72.466 3.277,72.949 6.706,72.949 7.514,73.757 7.514,75.241 7.59,75.317 7.95,75.678 7.95,78.562 9.627,80.239 13.132,80.239 13.36,80.467 14.961,80.467 v1(15.113,80.62)
V_switch: C18.2 C19.2 C21.2 C23.2 R6.2 R7.2 R13.1 U3.1 U3.6 U3.10 U4.1 U5.B1 U6.5 | length 36.4
  Top Layer w0.254: U3.6 1.63,76.171 1.803,75.997 3.226,75.997 ; U5.B1 3.505,80.014 ; U3.1 2.688,78.537 4.275,78.537 C21.2 ; U3.10 2.765,77.851 4.453,77.851 ; v1(3.505,80.62) 3.505,80.014 ; U6.5 3.484,62.912 2.972,63.424 2.972,67.041 3.226,67.295 ; U4.1 3.277,67.244 3.226,67.295 ; R7.2 R6.2 ; 3.226,67.295 3.226,75.997 ; 3.226,75.997 4.377,75.997 C19.2 C18.2 4.453,77.851 ; 3.505,80.014 3.814,80.014 R6.2 ; R6.2 4.453,79.375 C21.2 ; 4.453,77.851 C21.2
  Bottom Layer w0.152: v1(3.505,80.62) 3.505,84.684 R13.1
Vbat: C15.2 C17.2 D1.2 L4.1 R8.2 U2.3 | length 11.2
  Top Layer w0.254: R8.2 R8.2@9.923,70.155 ; R8.2@9.974,70.053 9.881,69.96 v1(9.881,68.021) ; U2.3 v1@12.218,67.667 ; C15.2 19.304,67.285 19.304,65.811 21.209,65.811 C15.2@21.209,67.31 ; v1(9.881,68.021) v1(10.516,68.021) 10.516,67.345 C17.2 9.881,67.244 v1(9.881,68.021)
  other v1: 17.513,63.83 18.313,63.83 16.713,64.668 17.513,64.668 18.313,64.668 12.218,67.767
VCC: C16.2 C20.2 L1.1 R3.1 R4.1 U2.2 U4.4 U4.5
VDDR: C7.2 C8.2 C9.2 L3.2 U1.29 U1.32 | length 22.2
  Top Layer w0.152: U1.29 12.696,72.292 13.462,71.526 15.824,71.526 16.129,71.222 C8.2 ; U1.32 14.259,72.746 v1(14.93,72.746) ; v1(16.713,70.637) 17.239,70.637 C9.2
  Bottom Layer w0.254: v1(4.724,68.351) v1(4.724,69.037) v1(4.724,69.723) 4.75,69.748 13.081,69.748 13.97,70.637 14.93,70.637 ; v1(14.93,72.746) 14.93,70.637 ; v1(16.713,70.637) 14.93,70.637
VDDS: C1.2 C2.2 C3.2 C4.2 L1.2 P2.1 R1.2 U1.11 U1.18 U1.28 | length 37.4
  Top Layer w0.254: P2.1@1.27,74.93 v1(2.54,74.93) v1@2.723,74.93 ; v1(6.198,75.032) v1(8.026,75.032) 8.026,75.354 8.179,75.506 8.12,75.565 C2.2 8.509,75.692 8.648,75.831 C3.2 ; v1(6.401,72.136) R1.2 ; C3.2@8.892,76.413 8.913,76.434 U1.18 ; v1(10.973,71.907) 11.176,72.111 12.196,72.111 ; U1.28 12.196,72.111 ; v4(13.179,79.705) 13.179,79.824 13.196,79.841 U1.11 ; L1.2 13.316,71.164 13.31,71.171 ; C1.2 14.283,70.604 13.716,71.171 13.31,71.171 ; 12.196,72.111 12.37,72.111 13.31,71.171
  Bottom Layer w0.254: v1(2.54,74.93) 6.02,74.93 6.121,75.032 v1(6.198,75.032) ; v1(6.401,72.136) 6.756,72.136 8.103,73.482 ; v1(10.973,71.907) 9.347,73.533 8.153,73.533 8.103,73.482 ; v4(13.179,79.705) 12.976,79.908 9.83,79.908 8.458,78.537 8.458,75.463 v1(8.026,75.032) 8.077,75.032 8.103,75.006 8.103,73.482
pads on no net: U1.10 U1.20 U1.25 U1.26 U1.27 U3.7 U4.3 U5.C2 U6.3 U6.4
copper on no net:
  other v2: 2,92.79 4,92.79 6,92.79 8,92.79 10,92.79 12,92.79 14,92.79 16,92.79 18,92.79 4,98.89 6,98.89 8,98.89 10,98.89 12,98.89 14,98.89 16,98.89 18,98.89 20,98.89

## Polygon pours and split planes (outlines as drawn)
GND on Top Layer "Top Layer-GND 1" (solid, pour order 106): 22.006,86.284 0,86.284 0,59.106 22.006,59.106
VDDR on Top Layer "Top Layer-VDDR" (solid, pour order 104): 5.105,71.425 5.105,67.97 3.912,67.97 3.277,68.605 3.277,71.247 3.454,71.425
Vbat on Top Layer "Top Layer-Vbat" (solid, pour order 100): 16.586,60.63 18.72,62.763 18.72,64.795 22.006,64.795 22.006,68.148 18.644,68.148 18.644,66.497 16.067,66.497 16.067,63.246 14.453,63.246 14.453,60.63
VCC on Top Layer "Top Layer-VCC" (solid, pour order 98): 12.548,68.885 12.573,68.91 15.85,68.91 16.18,68.58 16.18,67.793 16.053,67.666 13.691,67.666 12.548,66.523 12.548,63.5 12.268,63.221 8.306,63.221 7.29,64.237 7.29,66.573 7.455,66.739 9.842,66.739 10.897,67.793 10.897,69.494 11.201,69.799 12.141,69.799 12.548,69.393
NetL4_2 on Top Layer "Top Layer-NetL4_2" (solid, pour order 96): 13.284,66.497 18.644,66.497 18.644,67.92 13.284,67.92
NetBT1_1 on Top Layer "Top Layer-NetBT1_1" (solid, pour order 94): 9.068,63.246 14.453,63.246 14.453,60.63 9.068,60.63
GND on Top Layer "Top Layer-GND" (solid, pour order 44): 18.661,52.628 18.661,55.867 3.658,55.867 3.658,59.411 22.006,59.411 22.006,15.806 21.504,13.621 12.295,0.477 11,0.006 9.368,0.859 4.87,7.283 13.803,7.283 13.803,10.522 6.251,10.522 6.251,13.761 18.339,13.761 18.339,17 3.661,17 3.661,20.239 18.661,20.239 18.661,23.478 3.661,23.478 3.661,26.717 18.661,26.717 18.661,29.956 3.661,29.956 3.661,33.195 18.661,33.195 18.661,36.434 3.661,36.434 3.661,39.672 18.661,39.672 18.661,42.911 3.661,42.911 3.661,46.15 18.661,46.15 18.661,49.389 3.661,49.389 3.661,52.628
NetC22_1 on Top Layer "Top Layer-NetC28_1" (solid, pour order 14): 3.661,55.867 18.661,55.867 18.661,52.588 3.661,52.588 3.661,49.389 18.661,49.389 18.661,46.15 3.661,46.15 3.661,42.911 18.661,42.911 18.661,39.672 3.661,39.672 3.661,36.434 18.661,36.434 18.661,33.195 3.661,33.195 3.661,29.956 18.661,29.956 18.661,26.717 3.661,26.717 3.661,23.478 18.661,23.478 18.661,20.239 3.661,20.239 3.661,17 18.339,17 18.339,13.761 6.251,13.761 6.251,10.522 13.803,10.522 13.803,7.283 5.223,7.283 0,14.58 0,59.411 3.661,59.411
GND on Bottom Layer "Bottom Layer-GND" (solid, pour order 108): 22.006,86.284 0,86.284 0,59.411 22.006,59.411
Vbat on Bottom Layer "Bottom Layer-Vbat" (solid, pour order 102): 10.142,68.402 9.804,68.402 ccw(c9.804,68.124) 9.525,68.124 9.525,67.869 ccw(c9.957,67.869) 9.957,67.437 13.005,67.437 14.961,67.437 16.294,66.103 16.294,63.665 ccw(c16.688,63.665) 16.688,63.271 18.364,63.271 ccw(c18.364,63.652) 18.745,63.652 18.745,64.973 15.316,68.402
NetC22_1 on Bottom Layer "Top Layer-NetC28_1" (solid, pour order 48): 3.661,55.867 18.661,55.867 18.661,52.588 3.661,52.588 3.661,49.389 18.661,49.389 18.661,46.15 3.661,46.15 3.661,42.911 18.661,42.911 18.661,39.672 3.661,39.672 3.661,36.434 18.661,36.434 18.661,33.195 3.661,33.195 3.661,29.956 18.661,29.956 18.661,26.717 3.661,26.717 3.661,23.478 18.661,23.478 18.661,20.239 3.661,20.239 3.661,17 18.339,17 18.339,13.761 6.251,13.761 6.251,10.522 13.803,10.522 13.803,7.283 5.223,7.283 0,14.58 0,59.411 3.661,59.411
GND on Bottom Layer "Top Layer-GND" (solid, pour order 46): 18.661,52.628 18.661,55.867 3.658,55.867 3.658,59.411 22.006,59.411 22.006,15.806 21.504,13.621 12.295,0.477 11,0.006 9.368,0.859 4.87,7.283 13.803,7.283 13.803,10.522 6.251,10.522 6.251,13.761 18.339,13.761 18.339,17 3.661,17 3.661,20.239 18.661,20.239 18.661,23.478 3.661,23.478 3.661,26.717 18.661,26.717 18.661,29.956 3.661,29.956 3.661,33.195 18.661,33.195 18.661,36.434 3.661,36.434 3.661,39.672 18.661,39.672 18.661,42.911 3.661,42.911 3.661,46.15 18.661,46.15 18.661,49.389 3.661,49.389 3.661,52.628

## Keep-outs
Keep-Out Layer:
  lines w0.4: 0.006,59.198 0.508,59.198 ccw(c0.508,59.698) 0.501,60.198 0.001,60.198 0.001,98.506 0.006,98.506 cw(c1.506,98.506) 1.506,100.006 ; 22.006,15.806 22.006,15.806 ; 22.006,59.198 21.506,59.198 cw(c21.506,59.698) 21.513,60.198 22.006,60.198 22.006,98.506 ; 1.506,100.006 20.506,100.006 ; 1.506,100.006 1.506,100.006 ; 20.506,100.006 cw(c20.506,98.506) 22.006,98.506 ; 20.506,100.006 20.506,100.006 ; 22.006,98.506 22.006,98.506
  lines w2: 0.006,59.198 0.006,15.806 ccw(c5.006,15.806) 0.911,12.938 9.368,0.859 ccw(c11.006,2.006) 12.645,0.859 21.102,12.938 ccw(c17.006,15.806) 22.006,15.806 ; 22.006,15.806 22.006,59.198

## Silkscreen, mask and mechanical layers (free items; w line width, h text height)
Top Overlay:
  text "Håkan Gerner" at 5,90.475 h1.78
  text "iot-soil-sensor V1.0" at 5,88.862 h1.78
  text "2019-07-17" at 5,87.249 h1.78
  text "cJTAG" at 2.108,73.584 h0.66 r270
  text "RX" at 2.108,67.691 h0.66 r270
  text "TX" at 2.108,66.192 h0.66 r270
Mechanical 1:
  lines w0.013: 0,59.198 0.5,59.198 ; 0.001,98.506 0.001,60.198 0.501,60.198 cw(c0.508,59.698) 0.508,59.198 ; 0.006,59.198 0.006,15.806 ccw(c5.006,15.806) 0.911,12.938 9.368,0.859 ccw(c11.006,2.006) 12.645,0.859 21.102,12.938 ccw(c17.006,15.806) 22.006,15.806 ; 0.006,98.506 cw(c1.506,98.506) 1.506,100.006 20.506,100.006 cw(c20.506,98.506) 22.006,98.506 22.006,60.198 ; 22.006,15.806 22.006,59.198 21.506,59.198 cw(c21.506,59.698) 21.513,60.198 22.013,60.198